# Altium PCB Arduino_VFO.PcbDoc
Units mm, origin at the board's own origin, x right, y up, seen from the top; angles counter-clockwise.
Board outline 100 x 100 mm, 2 copper layers (Top Layer, Bottom Layer); 84 components, 56 nets, 263 pads, 348 vias.
Unrouted connection lines stored in the file: 1.
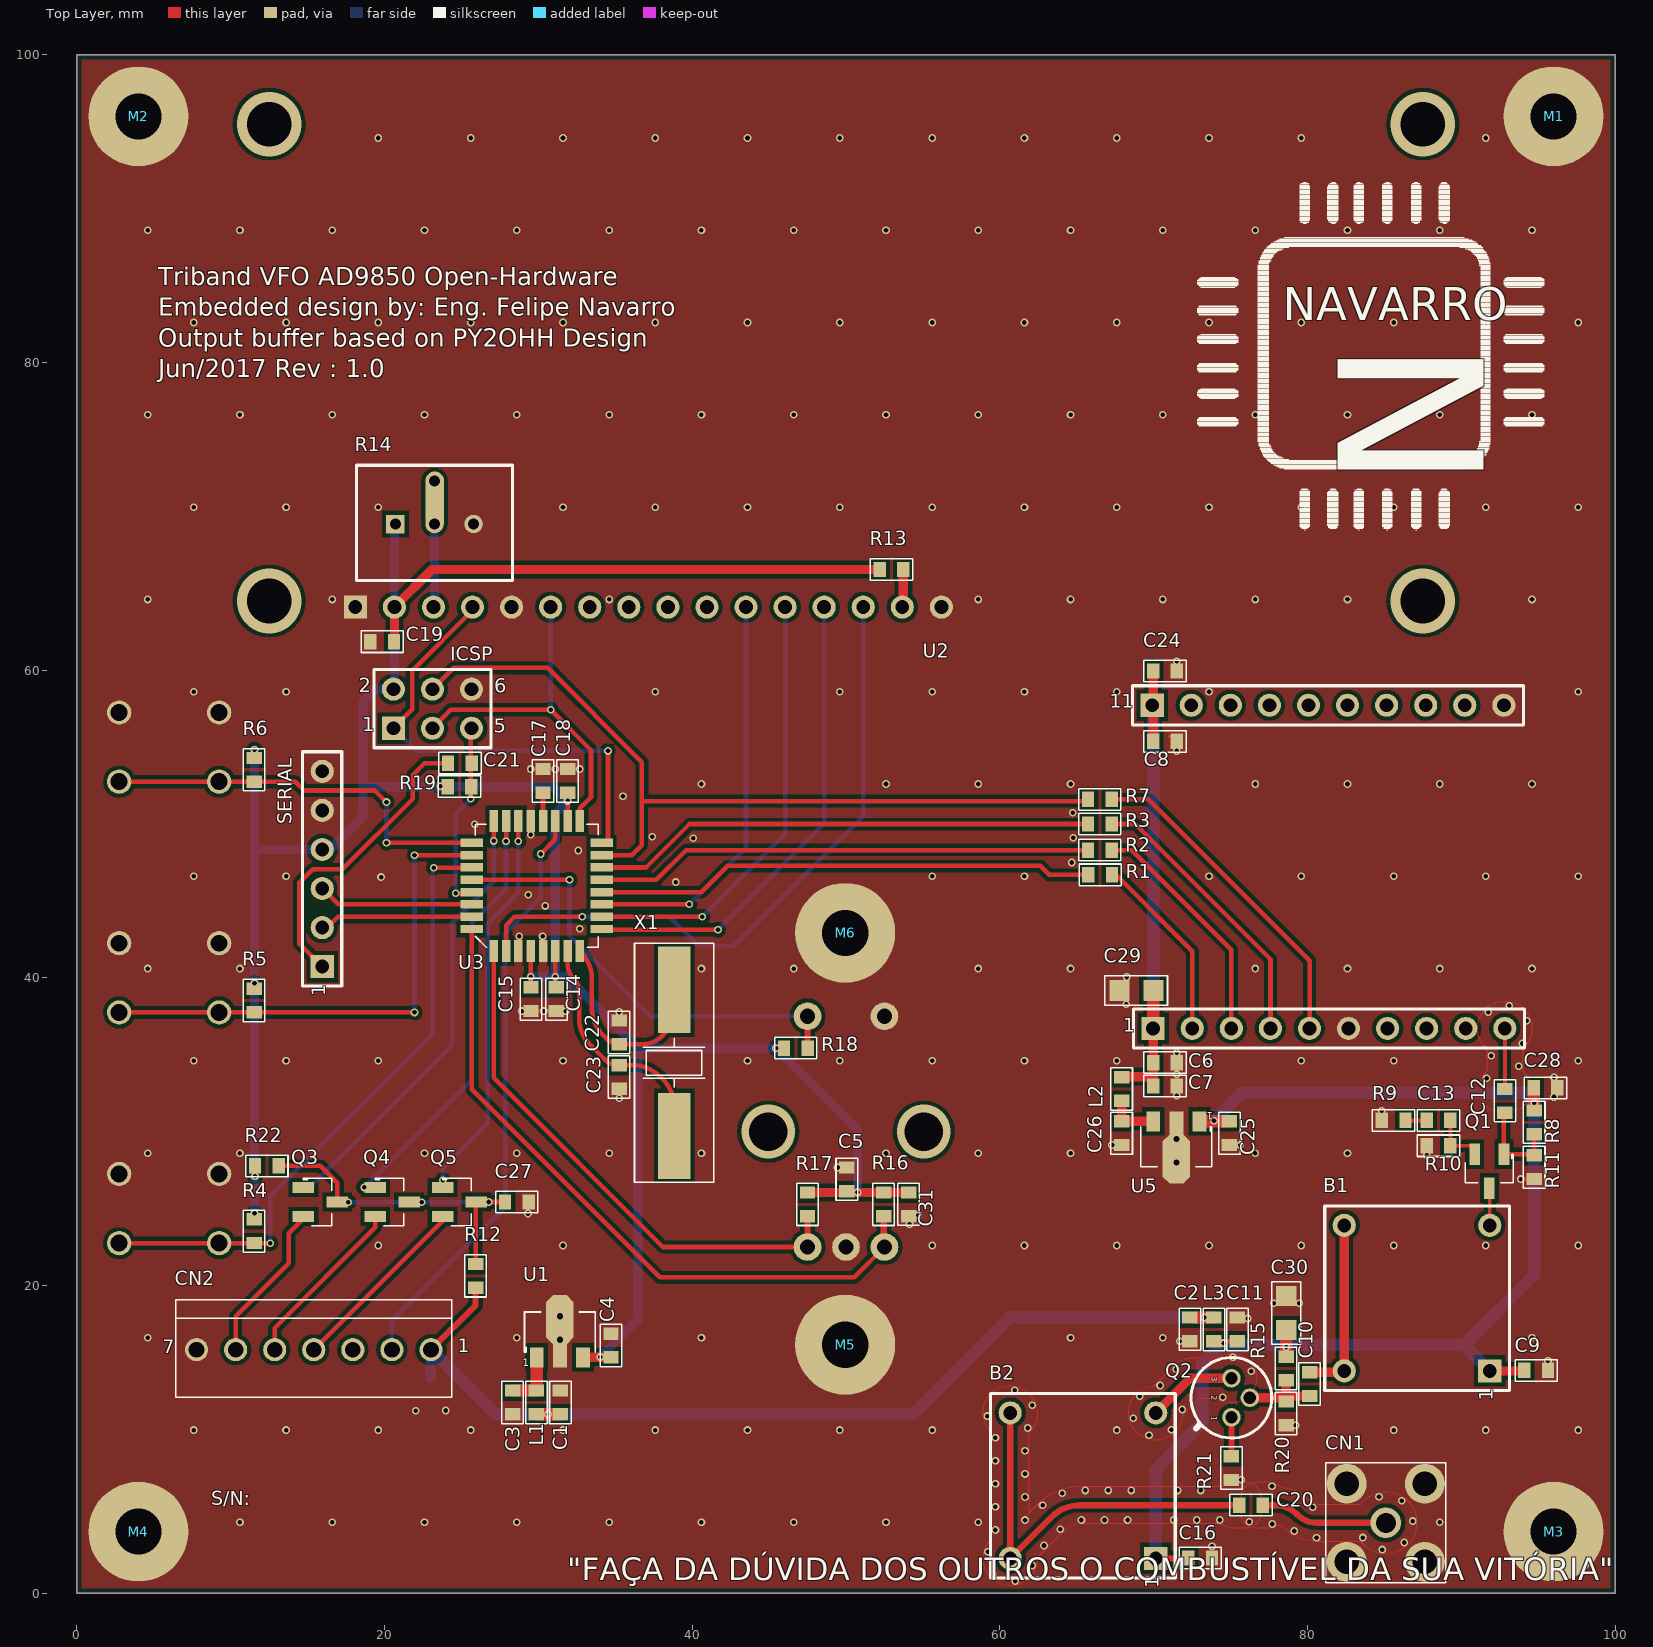
[diagram p0: Top Layer view]
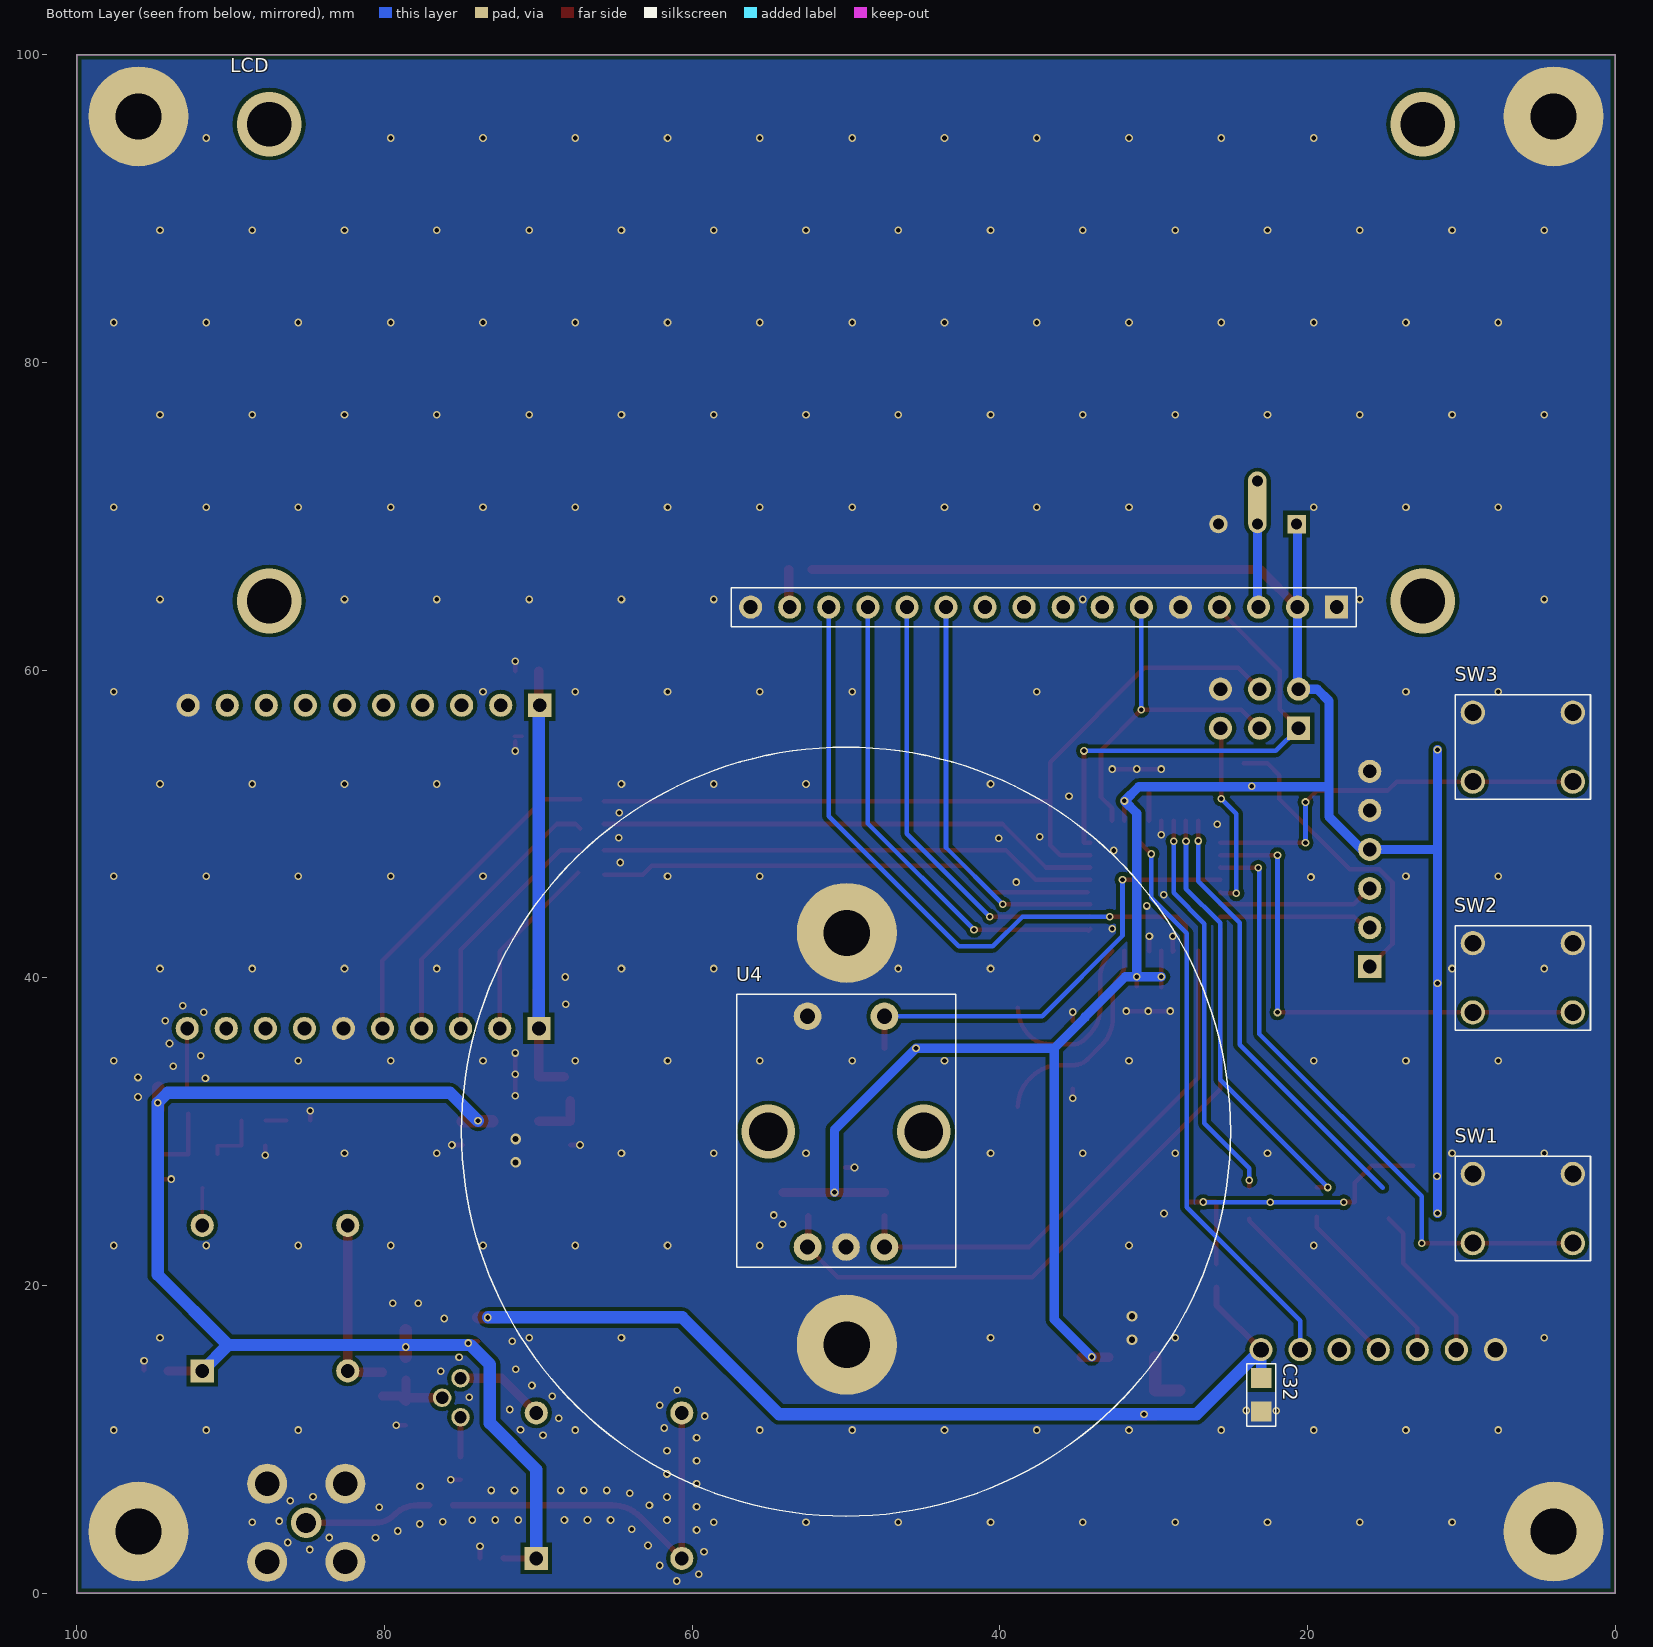
[diagram p1: Bottom Layer view, seen from below]

## Layer stack, top to bottom
Top Solder: solder mask 0.0102, Solder Resist, Dk 3.5
Top Layer: signal copper 0.0356
Dielectric 1: dielectric 0.32, FR-4, Dk 4.8
Bottom Layer: signal copper 0.0356
Bottom Solder: solder mask 0.0102, Solder Resist, Dk 3.5

## Board outline
0,0 100,0 100,100 0,100

## Design rules (kind name [scope] priority, off if disabled: settings)
Clearance [All] p1: gap=0.254
PolygonConnect [All] p1: connectstyle=Direct reliefconductorwidth=0.254 reliefentries=4 polygonreliefangle="90 Angle" airgapwidth=0.254
RoutingVias [All] p1: holewidth=0.711 width=1.27 viastyle="Through Hole" minholewidth=0.711 minwidth=1.27 maxholewidth=0.711 maxwidth=1.27
SolderMaskExpansion [All] p1: expansion=0.102
Width [All] p1: maxlimit=10 minlimit=0.254 preferedwidth=0.254
30 further rules are at their usual default settings.

## Components (designator, comment, footprint, x,y, rotation, side; value= is the part's Value field where it differs from the comment)
B1 "BIFILAR" "Toroid Bifilar" 87.122,19.177 r90 top
B2 "BIFILAR" "Toroid Bifilar" 65.405,6.985 r90 top
C1 "Capacitor Cerâmico" CC0603 31.425,12.4 r270 top
C2 "Capacitor Cerâmico" CC0603 72.35,17.15 r90 top
C3 "Capacitor Cerâmico" CC0603 28.325,12.4 r90 top
C4 "Capacitor Cerâmico" CC0603 34.725,16.1 r270 top
C5 "Capacitor Cerâmico" CC0603 50.05,26.9 r270 top
C6 "Capacitor Cerâmico" CC0603 70.739,34.49 r180 top
C7 "Capacitor Cerâmico" CC0603 70.739,32.966 r180 top
C8 "Capacitor Cerâmico" CC0603 70.739,55.372 r180 top
C9 "Capacitor Cerâmico" CC0603 94.869,14.478 r180 top
C10 "Capacitor Cerâmico" CC0603 80.137,13.589 r270 top
C11 "Capacitor Cerâmico" CC0603 75.438,17.145 r270 top
C12 "Capacitor Cerâmico" CC0603 92.837,32.004 r270 top
C13 "Capacitor Cerâmico" CC0603 88.519,30.734 r0 top
C14 "Capacitor Cerâmico" CC0603 31.174,38.608 r90 top
C15 "Capacitor Cerâmico" CC0603 29.523,38.608 r90 top
C16 "Capacitor Cerâmico" CC0603 73.025,2.286 r180 top
C17 "Capacitor Cerâmico" CC0603 30.3,52.8 r270 top
C18 "Capacitor Cerâmico" CC0603 31.9,52.8 r270 top
C19 "Capacitor Cerâmico" CC0603 19.85,61.85 r0 top
C20 "Capacitor Cerâmico" CC0603 76.327,5.715 r180 top
C21 "Capacitor Cerâmico" CC0603 24.9,53.95 r0 top
C22 "Capacitor Cerâmico" CC0603 35.25,33.55 r90 top
C23 "Capacitor Cerâmico" CC0603 35.25,36.45 r270 top
C24 "Capacitor Cerâmico" CC0603 70.739,59.944 r180 top
C25 "Capacitor Cerâmico" CC0603 74.925,29.9 r90 top
C26 "Capacitor Cerâmico" CC0603 67.925,29.9 r90 top
C27 "Capacitor Cerâmico" CC0603 28.6,25.425 r180 top
C28 "Capacitor Cerâmico" CC0603 95.475,32.85 r180 top
C29 "Capacitor Cerâmico" CC0805 68.875,39.175 r0 top
C30 "Capacitor Cerâmico" CC0805 78.625,18.2 r270 top
C31 "Capacitor Cerâmico" CC0603 54.075,25.275 r90 top
C32 "Capacitor Cerâmico" CC0805 23,12.9 r90 bottom
CN1 "Conn MCX" "CONN MCX MOLEX" 85.09,4.572 r0 top
CN2 "Conector KK" "CONN HDR7-POL P.100" 15.4,15.825 r0 top
ICSP "Header 3X2" "CONN HDR2X3" 20.575,56.225 r0 top
L1 "Bead" CC0603 29.875,12.4 r90 top
L2 "Bead" CC0603 67.925,32.775 r90 top
L3 "Bead" CC0603 73.914,17.145 r270 top
LCD "LCD1602" LCD-1602 50,80 r0 bottom locked
M1 "Furo de Fixação" Furo_M3 96,96 r0 top locked
M2 "Furo de Fixação" Furo_M3 4,96 r0 top locked
M3 "Furo de Fixação" Furo_M3 96,4 r0 top locked
M4 "Furo de Fixação" Furo_M3 4,4 r0 top locked
M5 "Furo de Fixação" Furo_M3 49.95,16.15 r0 top
M6 "Furo de Fixação" Furo_M3 49.95,42.925 r0 top
Q1 "MMBT3904" SOT-23-3N 91.821,27.432 r270 top
Q2 "2n3866" TO-92R 75.057,12.7 r270 top
Q3 "MMBT3904" SOT-23-3N 15.825,25.425 r0 top
Q4 "MMBT3904" SOT-23-3N 20.5,25.425 r0 top
Q5 "MMBT3904" SOT-23-3N 24.875,25.425 r0 top
R1 "Resistor" CC0603 66.525,46.7 r0 top
R2 "Resistor" CC0603 66.5,48.3 r0 top
R3 "Resistor" CC0603 66.5,50 r0 top
R4 "Resistor" CC0603 11.525,23.525 r90 top
R5 "Resistor" CC0603 11.525,38.525 r90 top
R6 "Resistor" CC0603 11.525,53.525 r90 top
R7 "Resistor" CC0603 66.5,51.6 r0 top
R8 "Resistor" CC0603 94.742,30.607 r90 top
R9 "Resistor" CC0603 85.598,30.734 r0 top
R10 "Resistor" CC0603 88.519,29.083 r0 top
R11 "Resistor" CC0603 94.742,27.686 r90 top
R12 "Resistor" CC0603 25.925,20.625 r270 top
R13 "Resistor" CC0603 52.959,66.548 r180 top
R14 "Potenciômetro" POT 23.25,69.5 r0 top
R15 "Resistor" CC0603 78.613,14.605 r90 top
R16 "Resistor" CC0603 52.451,25.273 r90 top
R17 "Resistor" CC0603 47.498,25.273 r90 top
R18 "Resistor" CC0603 46.736,35.433 r180 top
R19 "Resistor" CC0603 24.875,52.425 r180 top
R20 "Resistor" CC0603 78.613,11.684 r90 top
R21 "Resistor" CC0603 75.057,8.128 r90 top
R22 "Resistor" CC0603 12.35,27.775 r180 top
SERIAL "Header 6" "CONN HDR1X6" 15.95,40.725 r90 top
SW1 "Top Switch" SWITCH-TACTIL_6x6 6,25 r0 bottom
SW2 "Top Switch" SWITCH-TACTIL_6x6 6,40 r0 bottom
SW3 "Top Switch" SWITCH-TACTIL_6x6 6,55 r0 bottom
U1 "MC78L05A" SOT-89-3N 31.4,16.975 r90 top
U2 "AD9850" AD9850 69.969,36.711 r0 top
U3 "ATMEGA328P" TQFP-32N 29.904,45.974 r90 top
U4 "Encoder CTS290" "ENCODER - CTS 290" 50,30 r270 bottom locked
U5 "MC78L05A" SOT-89-3N 71.475,29.025 r270 top
X1 "16Mhz" HC/49US 38.825,34.475 r90 top

## Footprints (in the part's own frame and the unit in brackets; to place one, negate y for a bottom-side part, rotate by r counter-clockwise, add the part's x,y. Pads: shape width x height; smd on the part's side, far side on the other; paste and mask are expansions set on the pad)
AD9850 [mm] "Connector; Header; 10 Position"
  rect 1.5x1.5 hole 0.9: 1(0,0) 11(-0.062,21.007)
  round 1.5 hole 0.9: 2(2.54,0) 3(5.08,0) 4(7.62,0) 5(10.16,0) 6(12.7,0) 7(15.24,0) 8(17.78,0) 9(20.32,0) 10(22.86,0) 12(2.478,21.007) 13(5.018,21.007) 14(7.558,21.007) 15(10.098,21.007) 16(12.638,21.007) 17(15.178,21.007) 18(17.718,21.007) 19(20.258,21.007) 20(22.798,21.007)
  silkscreen extent -1.33,-1.27 24.13,22.28, body extent -14.97,-2.21 30.03,23.29, height 9.9
CC0603 [mm] "Chip Resistor, 2-Leads, Body 1,6x0,8mm, IPC Medium Density"
  rect 0.8x1 smd: 1(-0.77,0) 2(0.77,0)
  silkscreen extent -1.37,-0.7 1.38,0.7, body extent -0.8,-0.42 0.8,0.43, height 0.45
CC0805 [mm] "Chip Resistor, 2-Leads, Body 2,0x1,2mm, IPC Medium Density"
  rect 1.3x1.35 smd: 1(-1.1,0) 2(1.1,0)
  silkscreen extent -2.05,-0.95 2.02,0.95, body extent -1,-0.62 1,0.63, height 0.6
"CONN HDR1X6" [mm] "Connector; Header; 6 Position"
  rect 1.5x1.5 hole 0.9: 1(0,0)
  round 1.5 hole 0.9: 2(2.54,0) 3(5.08,0) 4(7.62,0) 5(10.16,0) 6(12.7,0)
  silkscreen extent -1.27,-1.27 13.97,1.27, body extent -1.27,-1.27 13.97,1.27, height 8.51
"CONN HDR2X3" [mm] "Connector; Header; 3x2 Position"
  rect 1.5x1.5 hole 0.9: 1(0,0)
  round 1.5 hole 0.9: 2(0,2.54) 3(2.54,0) 4(2.54,2.54) 5(5.08,0) 6(5.08,2.54)
  silkscreen extent -1.27,-1.27 6.35,3.81, body extent -1.27,-1.27 6.35,3.81, height 8.49
"CONN HDR7-POL P.100" [mm] "Conector KK Macho, Pitch 2.54mm, 7 Polos"
  round 1.5 hole 1.02: 1(7.62,0) 2(5.08,0) 3(2.54,0) 4(0,0) 5(-2.54,0) 6(-5.08,0) 7(-7.62,0)
  silkscreen extent -8.97,-3.11 8.97,3.25, body extent -8.57,-2.71 8.55,3.29, height 12
"CONN MCX MOLEX" [mm]
  round 2 hole 1.3: 1(0,0)
  round 2.6 hole 1.6: 2(2.54,-2.54) 3(2.54,2.54) 4(-2.54,2.54) 5(-2.54,-2.54)
  silkscreen extent -3.91,-3.89 3.89,3.89, body extent -3,-3 3,3, height 5.6
"ENCODER - CTS 290" [mm] "Trimmer Through Hole"
  round 1.8 hole 1: 1(7.5,2.5) 2(7.5,0) 3(7.5,-2.5) 4(-7.5,-2.5) 5(-7.5,2.5)
  silkscreen extent -8.92,-7.1 8.83,7.14, body extent -7.52,-6.61 7.43,6.49, height 24.8
Furo_M3 [mm] "Furo metalizado para parafuso M3"
  round 6.5 hole 3 paste+0: X(0,0)
  body extent -2.8,-2.8 2.8,2.8, height 2.38
HC/49US [mm] "Crystal, 2-Leads, Body 11,5x4,7mm, IPC Low Density"
  rect 5.6x2.1 smd: 1(-4.75,0) 2(4.75,0)
  silkscreen extent -7.77,-2.58 7.78,2.58, body extent -6.15,-2.25 6.15,2.25, height 5.18
LCD-1602 [mm]
  rect 1.5x1.5 hole 0.9: 1(-31.9,15.9)
  round 1.5 hole 0.9: 2(-29.36,15.9) 3(-26.82,15.9) 4(-24.28,15.9) 5(-21.74,15.9) 6(-19.2,15.9) 7(-16.66,15.9) 8(-14.12,15.9) 9(-11.58,15.9) 10(-9.04,15.9) 11(-6.5,15.9) 12(-3.96,15.9) 13(-1.42,15.9) 14(1.12,15.9) 15(3.66,15.9) 16(6.2,15.9)
  silkscreen extent -33.17,14.63 7.47,17.17, body extent -40,-18 40,18, height 20.7
POT [mm] "Thru-Hole; 3 Leads"
  rect 1.2x1.2 hole 0.7: 1(-2.54,0)
  oval 1.2x4 hole 0.7 copper offset 0,1.4: 2(0,0)
  round 1.2 hole 0.7: 3(2.54,0)
  silkscreen extent -5.08,-3.68 5.08,3.82, body extent -4.6,-2.41 4.6,2.39, height 12.01
SOT-23-3N [mm] "SOT23, 3-Leads, Body 3,1x2,7mm (max), Pitch 0,95mm, IPC Medium Density"
  rect 1.4x0.7 smd: 1(-1.1,0.95) 2(-1.1,-0.95) 3(1.1,0)
  silkscreen extent -1.1,-1.55 0.75,1.55, body extent -1.4,-1.45 1.4,1.45, height 1.25
SOT-89-3N [mm] "SOT89, 3-Leads, Body 4,5x2,4mm (max), Pitch 1,50mm, Lead Span 4,1mm, IPC High Density"
  rect 1.3x0.9 smd: 1(-1.65,1.5) 3(-1.65,-1.5)
  rect 1.5x0.9 smd: 2(-1.55,0)
  oct 3.2x1.8 smd: 2(0.8,0)
  silkscreen extent -1.3,-2.3 1.3,2.3, body extent -2.18,-2.25 1.75,2.25, height 1.4
SWITCH-TACTIL_6x6 [mm]
  round 1.575 hole 1.1 paste+0 mask+0.102: 1(-3.25,2.25) 2(3.25,2.25) 3(-3.25,-2.25) 4(3.25,-2.25)
  silkscreen extent -4.4,-3.4 4.4,3.4, body extent -3,-3 3,3, height 16.6
TO-92R [mm]
  round 1.2 hole 0.8: 1(1.27,0) 2(0,1.2) 3(-1.27,0)
  silkscreen extent -2.62,-2.62 2.62,2.62, body extent -2.8,-2.81 2.81,2.8, height 4.8
"Toroid Bifilar" [mm] "Connector; Header; 4 Position"
  rect 1.5x1.5 hole 0.9: 1(-4.73,-4.73)
  round 1.5 hole 0.9: 2(-4.73,4.73) 3(4.73,4.73) 4(4.73,-4.73)
  silkscreen extent -6,-6 6,6, body extent -3.99,-4.01 4.01,3.98, height 3.3
TQFP-32N [mm] "TQFP, 32-Leads, Body 7.00x7.00mm, Pitch 0.80mm, IPC Medium Density"
  rect 1.45x0.55 smd: 1(-4.225,2.8) 2(-4.225,2) 3(-4.225,1.2) 4(-4.225,0.4) 5(-4.225,-0.4) 6(-4.225,-1.2) 7(-4.225,-2) 8(-4.225,-2.8) 17(4.225,-2.8) 18(4.225,-2) 19(4.225,-1.2) 20(4.225,-0.4) 21(4.225,0.4) 22(4.225,1.2) 23(4.225,2) 24(4.225,2.8)
  rect 0.55x1.45 smd: 9(-2.8,-4.225) 10(-2,-4.225) 11(-1.2,-4.225) 12(-0.4,-4.225) 13(0.4,-4.225) 14(1.2,-4.225) 15(2,-4.225) 16(2.8,-4.225) 25(2.8,4.225) 26(2,4.225) 27(1.2,4.225) 28(0.4,4.225) 29(-0.4,4.225) 30(-1.2,4.225) 31(-2,4.225) 32(-2.8,4.225)
  silkscreen extent -4,-4 4,4, body extent -4.5,-4.5 4.5,4.5, height 1.5

## Part data
B1 B2: library part "Toroid Bifilar", "Toroid Bifilar"
C1 C5 C6 C18: library part "Cap 1uF 50V 0603 X5R", "Capacitor (Semiconductor SIM Model)"
C2 C3 C4 C7 C9 C10 C11 C12 C13 C14 C15 C16 C17 C19 C20 C21 C24 C25 C26 C27 C28 C31: library part "Cap 100nF 50V 0603 X7R", "Capacitor (Semiconductor SIM Model)"
C8: library part "Cap 1nF 50V 0603 NP0", "Capacitor (Semiconductor SIM Model)"
C22 C23: library part "Cap - $Val $V $Footprint $Classe_1", "Capacitor (Semiconductor SIM Model)"
C29 C30 C32: library part "Cap 10uF 25V 0805 X5R", "Capacitor (Semiconductor SIM Model)"
CN1: "Conector MCX"
CN2: library part "KK 7P Macho-V P2.54mm"
ICSP: "Header, 5-Pin, Dual row"
L1 L2 L3: library part "Bd 1K@100MHz 0603 400mA"
LCD: "LCD Generico 16 caracteres X 2 linhas"
M1 M2 M3 M4 M5 M6: library part Parafuso, "Furo para parafuso"
Q1 Q3 Q4 Q5: library part "TRS MMBT3904 40V 200mA SOT-23-3N", "NPN General Purpose Amplifier"
Q2: library part "TRS BC108 TO-18", "NPN General Purpose Amplifier"
R1 R2 R3 R7: library part "Res 470R 5% 0603 1/10W"
R4 R5 R6 R16 R17 R18: library part "Res 4K7 1% 0603 1/10W"
R8 R15: library part "Res 2K2 5% 0603 1/10W"
R9: library part "Res 4R7 1% 0603 1/10W"
R10: library part "Res 100R 5% 0603 1/10W"
R11 R20: library part "Res 1K 1% 0603 1/10W"
R12 R22: library part "Res 0R 0603 1/10W"
R13: library part "Res 220R 1% 0603 1/10W"
R14: library part "Res Pot", "Potenciometro"
R19: library part "Res 10K 1% 0603 1/10W"
R21: library part "Res 47K 1% 0603 1/10W"
SERIAL: "Header, 6-Pin"
SW1 SW2 SW3: library part "SW-SPST Tactil", "Single-Pole, Single-Throw Switch"
U1 U5: library part MC78L05, "Regulador Linear 5V"
U2: "DDS AD9850 Module"
U3: "IC MCU 32KB FLASH 20MHZ 32TQFP"
U4: library part "Encoder CTS 290", "Memória"
X1: library part XTAL, "Crystal Oscillator"

## Via types
v1: diameter 0.5, hole 0.3, Top Layer to Bottom Layer, tented both sides, 337 vias
v2: diameter 0.7, hole 0.4, Top Layer to Bottom Layer, tented both sides, 4 vias
v3: diameter 4.2, hole 2.9, Top Layer to Bottom Layer, 4 vias
v4: diameter 3.5, hole 2.5, Top Layer to Bottom Layer, 2 vias
v5: diameter 1.2, hole 0.7, Top Layer to Bottom Layer, 1 vias

## Nets (pads, with @x,y where several pads share a name; then routed paths per layer and width w, separated by ;. In a path a pad name is that pad's centre, name@x,y a point inside that pad or via, vN(x,y) a via of type N, cw(c..) or ccw(c..) an arc to the next point about the centre after c; other vN are vias at no path point)
5V: C4.2 C5.2 C14.2 C15.2 C18.2 C19.2 C31.2 ICSP.2 LCD.2 R4.2 R5.2 R6.2 R13.2 R14.1 R16.2 R17.2 R18.2 R19.2 R22.2 SERIAL.4 U1.3 U3.4 U3.6 U3.18 | length 183.5
  Top Layer w0.3: C15.2@29.504,39.397 U3.4 ; C14.2@31.104,39.448 v1(31.104,40.075) U3.6 ; U3.18@31.9,50.199 v1(31.9,51.5)
  Top Layer w0.6: C19.2@20.64,62.095 LCD.2 23.088,66.548 R13.2 ; U1.3@32.905,15.33 C4.2 ; R17.2 R16.2 52.453,26.045 C31.2
  Bottom Layer w0.6: v1(11.545,24.695) 11.545,48.345 ; v1(11.545,54.82) 11.545,48.345 ; ICSP.2 19.365,58.765 18.6,58 18.6,52.425 ; ICSP.2@20.64,58.675 LCD.2 R14.1@20.64,69.43 ; v1(29.5,40.075) v1(31.104,40.075) ; v1(34.025,15.35) 36.463,17.788 36.463,35.425 ; v1(50.75,26.05) 50.75,30.125 v1(45.45,35.425) 36.463,35.425 ; 11.545,48.345 SERIAL.4 16.47,48.345 18.6,50.475 18.6,52.425 ; 18.6,52.425 30.975,52.425 v1(31.9,51.5) 31.104,50.704 v1(31.104,40.075) ; v1(31.104,40.075) 31.85,40.075 34.446,37.479 34.446,37.442 36.463,35.425
  other v1: 11.58,27.105 11.55,39.65 23.625,52.45
5V_DDS: C6.2 C7.2 C8.2 C24.2 C29.2 L2.2 U2.1 U2.11 | length 35.1
  Top Layer w0.4: C8.2@69.915,55.426 U2.11@69.915,57.71
  Top Layer w0.6: L2.2@68.311,33.575 69.969,33.575 C6.2 U2.1 ; C8.2 C24.2
  Top Layer w0.8: U2.1@69.975,36.717 C29.2
  Bottom Layer w0.8: U2.1@69.977,36.703 U2.11@69.977,57.648
12V: C1.2 C2.2 C32.2 CN2.1 L1.1 L3.1 R12.2 | length 64.5
  Top Layer w0.4: CN2.1 25.925,18.73 R12.2
  Top Layer w0.8: L1.1 C1.2 ; C2.2@72.6,17.915 L3.1
  Bottom Layer w0.7: C32.2 23,15.805 CN2.1
  Bottom Layer w0.8: CN2.1 27.22,11.625 54.35,11.625 60.65,17.925 v1@73.275,17.925
  other v1: 30.625,11.625 73.285,17.915
12V_POWER: B1.1 B2.1 C9.2 C11.2 C16.2 C25.2 C28.2 C30.2 L3.2 R8.2 R15.2 U5.1 | length 84
  Top Layer w0.254: C9.2@94.068,14.447 C9.2
  Top Layer w0.3: L3.2@73.922,16.383 C11.2@75.43,16.383
  Top Layer w0.4: B2.1 72.18,2.255 ccw(c72.18,2.361) C16.2
  Top Layer w0.6: B1.1 C9.2@94.068,14.447
  Top Layer w0.8: U5.1 C25.2@74.92,30.675 ; R15.2 78.625,15.387 C30.2 ; R8.2@94.705,31.414 C28.2
  Bottom Layer w0.8: B2.1 70.135,8.032 73.152,11.049 73.152,14.859 v1@74.422,16.129 ; v1(73.925,30.7) 75.75,32.525 94.094,32.525 v1(94.742,31.877) ; v1@74.549,16.129 90.17,16.129 ; B1.1 90.17,16.129 ; v1@94.742,31.75 94.742,20.701 90.17,16.129
  other v1: 78.613,16.002 74.549,16.256
A: R17.1 U3.1 U4.1 | length 35.2
  Top Layer w0.3: U3.1 27.104,33.496 38.1,22.5 U4.1
  Top Layer w0.4: U4.1@47.498,22.502 R17.1
B: R16.1 U3.32 U4.3 | length 45.1
  Top Layer w0.3: U3.32 25.679,32.746 37.9,20.525 50.525,20.525 U4.3
  Top Layer w0.4: U4.3@52.451,22.549 R16.1
CNTR1: CN2.6 Q3.2 | length 10.3
  Top Layer w0.3: CN2.6 10.32,17.995 13.775,21.45 13.775,23.4 Q3.2@14.725,24.35
CNTR2: CN2.5 Q4.2 | length 11.4
  Top Layer w0.3: CN2.5 12.86,17.235 19.4,23.775 Q4.2
CNTR3: CN2.4 Q5.2 | length 12
  Top Layer w0.3: CN2.4 23.775,24.2 Q5.2@23.775,24.346
DATA: R3.1 U3.14 | length 32.8
  Top Layer w0.3: U3.14 36.999,47.174 39.825,50 R3.1
DB4: LCD.11 U3.11 | length 26.5
  Top Layer w0.3: U3.11 U3.11 v1(39.8,44.775)
  Bottom Layer w0.3: v1(39.8,44.775) 43.5,48.475 LCD.11
DB5: LCD.12 U3.10 | length 28.9
  Top Layer w0.3: U3.10 34.155,44 34.18,43.975 v1(40.65,43.975)
  Bottom Layer w0.3: v1(40.65,43.975) 46.04,49.365 LCD.12
DB6: LCD.13 U3.9 | length 31.5
  Top Layer w0.3: U3.9 34.253,43.05 34.328,43.125 v1(41.675,43.125)
  Bottom Layer w0.3: v1(41.675,43.125) 48.58,50.03 LCD.13
DB7: LCD.14 U3.2 | length 43
  Top Layer w0.3: U3.2 27.904,43.429 28.45,43.975 v1(32.85,43.975)
  Bottom Layer w0.3: v1(32.85,43.975) 38.525,43.975 40.45,42.05 42.675,42.05 51.12,50.495 LCD.14
FQUP: R2.1 U3.13 | length 32.4
  Top Layer w0.3: U3.13 37.674,46.374 39.6,48.3 R2.1
GND: C1.1 C2.1 C3.1 C4.1 C5.1 C6.1 C7.1 C8.1 C9.1 C11.1 C14.1 C15.1 C16.1 C17.1 C18.1 C19.1 C22.1 C23.1 C24.1 C25.1 C26.1 C27.1 C28.1 C29.1 C30.1 C31.1 C32.1 CN1.2 CN1.3 CN1.4 CN1.5 CN2.7 ICSP.6 LCD.1 LCD.5 LCD.16 M1.X M2.X M3.X M4.X M5.X M6.X R9.1 R10.1 R11.1 R14.3 R20.1 R21.1 SERIAL.5 SERIAL.6 SW1.3 SW1.4 SW2.3 SW2.4 SW3.3 SW3.4 U1.2 U2.6 U2.20 U3.3 U3.5 U3.21 U4.2 U4.4 U5.2 | length 21.5
  Top Layer w0.254: 71.05,55.705 C8.1@71.558,55.705
  Top Layer w0.3: U3.3 28.75,41.703 v1(28.75,42.7) ; v1(28.913,37.838) C15.1 v1(31.787,37.838) ; v1(29.5,53.57) C17.1 C18.1 v1(32.7,53.57) ; v1(29.504,49.304) U3.21 ; v1@30.275,42.775 30.275,41.778 U3.5 U3.5@30.285,41.73 ; v1(35.25,32.175) C22.1 ; C23.1 v1(35.25,37.775) ; v1(49.45,27.67) C5.1 ; v1(67.295,29.13) C26.1 ; v1@71.509,32.339 C7.1 v1(71.509,33.728) C6.1 v1(71.509,35.117) ; v1(71.509,54.745) C8.1 ; C24.1 v1(71.509,60.571) ; C16.1 v1(73.795,3.04) ; C25.1 v1(75.62,29.13) ; R21.1 75.057,7.366 v1(75.692,7.366) ; R20.1 79.24,10.914 v1(79.248,10.922) ; R9.1 v1(84.828,31.361) ; v1(87.749,28.456) R10.1 ; v1(93.861,26.916) R11.1 ; v1(95.631,15.113) 95.639,15.105 C9.1
  other v1: 61.007,0.784 59.574,1.226 62.112,1.798 59.231,2.686 84.865,2.83 62.871,3.093 86.293,3.288 80.585,3.608 83.585,3.612 79.147,4.036 59.715,4.106 63.931,4.153 77.719,4.495 10.6,4.6 16.6,4.6 22.6,4.6 28.6,4.6 34.6,4.6 40.6,4.6 46.6,4.6 52.6,4.6 58.6,4.6 88.6,4.6 76.225,4.632 86.847,4.682 61.635,4.748 65.306,4.755 66.806,4.755 68.306,4.755 71.306,4.755 72.806,4.755 74.306,4.755 80.344,5.585 59.715,5.606 62.78,5.717 86.121,5.995 61.635,6.248 84.647,6.274 64.064,6.492 65.553,6.675 67.053,6.675 68.553,6.675 71.553,6.675 73.053,6.675 77.693,6.946 59.715,7.106 61.635,7.748 59.715,8.606 61.635,9.248 59.715,10.106 69.701,10.272 7.6,10.6 13.6,10.6 19.6,10.6 25.6,10.6 31.6,10.6 37.6,10.6 43.6,10.6 49.6,10.6 55.6,10.6 67.6,10.6 85.6,10.6 91.6,10.6 97.6,10.6 71.162,10.611 61.823,10.736 68.67,11.362 59.183,11.509 22.025,11.85 23.975,11.875 71.861,11.938 62.1,12.21 74.494,12.724 69.091,12.802 60.97,13.196 70.418,13.501 76.345,14.414 71.479,14.561 75.155,15.327 71.7,16.375 4.6,16.6 28.6,16.6 40.6,16.6 64.6,16.6 70.6,16.6 94.6,16.6 76.125,17.85 77.8,18.85 79.475,18.85 19.6,22.6 31.6,22.6 55.6,22.6 61.6,22.6 67.6,22.6 73.6,22.6 79.6,22.6 85.6,22.6 91.6,22.6 97.6,22.6 54.125,23.975 54.7,24.575 29.325,24.675 4.6,28.6 10.6,28.6 22.6,28.6 28.6,28.6 34.6,28.6 40.6,28.6 52.6,28.6 58.6,28.6 64.6,28.6 76.6,28.6 82.6,28.6 96.025,32.25 71.501,32.331 91.644,33.462 96.025,33.525 93.731,34.252 7.6,34.6 13.6,34.6 19.6,34.6 31.6,34.6 43.6,34.6 49.6,34.6 55.6,34.6 61.6,34.6 67.6,34.6 73.6,34.6 79.6,34.6 85.6,34.6 97.6,34.6 91.943,34.932 93.977,35.732 94.254,37.206 91.757,37.77 30.35,37.838 93.124,38.192 68.225,38.275 68.25,40.05 4.6,40.6 10.6,40.6 40.6,40.6 46.6,40.6 58.6,40.6 64.6,40.6 76.6,40.6 82.6,40.6 88.6,40.6 94.6,40.6 30.275,42.7 32.7,43.2 30.45,44.675 29.35,45.4 38.925,46.225 19.775,46.55 7.6,46.6 13.6,46.6 55.6,46.6 61.6,46.6 73.6,46.6 79.6,46.6 85.6,46.6 91.6,46.6 97.6,46.6 64.675,47.5 32.6,48.275 40.075,49.075 64.775,49.1 37.4,49.175 25.875,49.975 64.75,50.725 35.5,51.8 40.6,52.6 52.6,52.6 58.6,52.6 64.6,52.6 76.6,52.6 82.6,52.6 88.6,52.6 94.6,52.6 31.1,53.575 7.6,58.6 13.6,58.6 37.6,58.6 49.6,58.6 55.6,58.6 61.6,58.6 67.6,58.6 73.6,58.6 97.6,58.6 4.6,64.6 16.6,64.6 34.6,64.6 58.6,64.6 64.6,64.6 70.6,64.6 76.6,64.6 82.6,64.6 94.6,64.6 7.6,70.6 13.6,70.6 19.6,70.6 31.6,70.6 37.6,70.6 43.6,70.6 49.6,70.6 55.6,70.6 61.6,70.6 67.6,70.6 73.6,70.6 79.6,70.6 85.6,70.6 91.6,70.6 97.6,70.6 4.6,76.6 10.6,76.6 16.6,76.6 22.6,76.6 28.6,76.6 34.6,76.6 40.6,76.6 46.6,76.6 52.6,76.6 58.6,76.6 64.6,76.6 70.6,76.6 76.6,76.6 82.6,76.6 88.6,76.6 94.6,76.6 7.6,82.6 13.6,82.6 19.6,82.6 25.6,82.6 31.6,82.6 37.6,82.6 43.6,82.6 49.6,82.6 55.6,82.6 61.6,82.6 67.6,82.6 73.6,82.6 79.6,82.6 85.6,82.6 91.6,82.6 97.6,82.6 4.6,88.6 10.6,88.6 16.6,88.6 22.6,88.6 28.6,88.6 34.6,88.6 40.6,88.6 46.6,88.6 52.6,88.6 58.6,88.6 64.6,88.6 70.6,88.6 76.6,88.6 82.6,88.6 88.6,88.6 94.6,88.6 19.6,94.6 25.6,94.6 31.6,94.6 37.6,94.6 43.6,94.6 49.6,94.6 55.6,94.6 61.6,94.6 67.6,94.6 73.6,94.6 79.6,94.6 91.6,94.6
  other v2: 31.4,16.475 31.4,17.995 71.475,28.005 71.475,29.525
MISO: ICSP.1 LCD.4 U3.16 | length 30.7
  Top Layer w0.3: ICSP.1 21.8,57.45 21.8,59.975 LCD.4@25.72,63.895 ; U3.16 34.524,48.774 34.525,48.775 v1(34.525,54.75)
  Bottom Layer w0.3: ICSP.1 22.05,54.75 v1(34.525,54.75)
MOSI: ICSP.4 R7.1 U3.15 | length 54
  Top Layer w0.3: ICSP.4 24.5,60.15 30.6,60.15 36.725,54.025 36.725,51.475 ; U3.15 36.074,47.974 36.725,48.625 36.725,51.475 ; R7.1@65.73,51.475 36.725,51.475
NetB1_2: B1.2 B1.3 C10.1 | length 11.6
  Top Layer w0.6: C10.1 B1.2@82.304,14.359 ; B1.2 B1.3
NetB1_4: B1.4 Q1.3 | length 2.4
  Top Layer w0.254: Q1.3 91.852,26.301 B1.4
NetB2_2: B2.2 B2.3 C20.2 | length 25.7
  Top Layer w0.4: B2.3 B2.2 63.391,4.971 cw(c65.187,3.175) 65.187,5.715 C20.2
NetB2_4: B2.4 Q2.3 | length 5.9
  Top Layer w0.6: B2.4 72.39,13.97 Q2.3
NetC3_2: C3.2 L1.2 U1.1 | length 3.7
  Top Layer w0.8: C3.2 L1.2 29.9,13.195 U1.1
NetC12_1: C12.1 U2.10 | length 3.9
  Top Layer w0.254: C12.1 U2.10@92.837,36.703
NetC12_2: C12.2 Q1.1 R8.1 R11.2 | length 5.9
  Top Layer w0.3: C12.2@92.771,31.168 Q1.1 R11.2@94.666,28.532 ; R11.2 R8.1
NetC13_1: C13.1 R9.2 | length 1.4
  Top Layer w0.254: R9.2 C13.1
NetC13_2: C13.2 Q1.2 R10.2 | length 3.8
  Top Layer w0.254: C13.2 R10.2 90.871,29.083 Q1.2
NetC17_2: C17.2 U3.20 | length 1.8
  Top Layer w0.3: U3.20@30.3,50.199 C17.2
NetC20_1: C20.1 CN1.1 | length 8.3
  Top Layer w0.4: C20.1 77.842,5.715 cw(c77.842,3.547) 79.375,5.08 ccw(c80.601,6.306) 80.601,4.572 CN1.1
NetC21_1: C21.1 SERIAL.1 | length 19.9
  Top Layer w0.3: SERIAL.1 14.475,42.2 14.475,46.2 15.325,47.05 17.25,47.05 21.825,51.625 21.825,53.175 22.6,53.95 C21.1
NetC26_2: C26.2 L2.1 U5.3 | length 3.4
  Top Layer w0.6: C26.2 L2.1 ; C26.2@67.93,30.675 U5.3
NetC27_2: C27.2 Q3.3 Q4.3 Q5.3 R12.1 R22.1 | length 21.2
  Top Layer w0.3: R22.1 15.825,27.775 16.925,26.675 Q3.3 v1@17.65,25.425 ; R12.1 25.925,25.4 Q5.3@25.975,25.45 ; Q5.3 v1(26.775,25.425) C27.2@27.78,25.425
  Bottom Layer w0.3: v1(17.65,25.4) v1(22.425,25.4) v1@26.775,25.4
NetLCD_3: LCD.3 R14.2 | length 5.3
  Bottom Layer w0.6: LCD.3@23.25,64.17 R14.2
  other v5: 23.25,72.3
NetLCD_15: LCD.15 R13.1 | length 2.4
  Top Layer w0.6: LCD.15@53.729,64.169 R13.1
NetQ2_1: Q2.1 R21.2 | length 2.5
  Top Layer w0.4: R21.2 Q2.1
NetQ3_1: Q3.1 U3.24 | length 28.7
  Top Layer w0.3: v1@27.104,48.979 U3.24
  Bottom Layer w0.3: 15.113,26.362 24.4,35.65 24.4,43.575 27.1,46.275 v1(27.1,48.9)
NetQ4_1: Q4.1 U3.23 | length 28.3
  Top Layer w0.3: v1(18.675,26.375) Q4.1 ; v1@27.904,48.904 U3.23
  Bottom Layer w0.3: v1(18.675,26.375) 25.675,33.375 25.675,43.575 27.9,45.8 v1(27.9,48.875)
NetQ5_1: Q5.1 U3.22 | length 25.7
  Top Layer w0.3: Q5.1@23.775,26.4 v1(23.775,26.85) ; v1@28.704,48.904 U3.22
  Bottom Layer w0.3: v1@23.775,26.95 23.775,27.625 26.7,30.55 26.7,43.525 28.7,45.525 v1(28.7,48.875)
NetR1_2: R1.2 U2.2 | length 12.2
  Top Layer w0.3: R1.2@67.422,46.827 72.517,41.733 U2.2@72.517,36.703
NetR2_2: R2.2 U2.3 | length 15.6
  Top Layer w0.3: R2.2@67.3,48.3 68.575,48.3 75.057,41.818 U2.3@75.057,36.703
NetR3_2: R3.2 U2.4 | length 18.6
  Top Layer w0.3: R3.2@67.27,49.705 67.565,50 68.8,50 77.597,41.203 U2.4@77.597,36.703
NetR7_2: R7.2 U2.5 | length 21.6
  Top Layer w0.3: R7.2 69.65,51.6 80.137,41.113 U2.5@80.137,36.703
OUTA: C10.2 Q2.2 R15.1 R20.2 | length 5.2
  Top Layer w0.6: Q2.2 R20.2@78.367,12.7 ; R15.1 R20.2 78.978,12.819 C10.2
RST: C21.2 ICSP.5 R19.1 U3.29 | length 12.2
  Top Layer w0.3: v1(24.625,45.5) 25.605,45.5 U3.29 ; v1(25.6,51.65) 25.6,56.17 ICSP.5
  Bottom Layer w0.3: v1(24.625,45.5) 24.625,50.675 v1(25.6,51.65)
RX: SERIAL.3 U3.30 | length 10.2
  Top Layer w0.3: SERIAL.3 16.981,44.774 U3.30
SCK: ICSP.3 LCD.6 U3.17 | length 23.5
  Top Layer w0.3: ICSP.3 24.315,57.425 v1(30.8,57.425) 33.425,54.8 33.425,51.75 32.704,51.029 U3.17
  Bottom Layer w0.3: v1(30.8,57.425) LCD.6
SW1: R18.1 U3.28 U4.5 | length 29.7
  Top Layer w0.3: U3.28 v1(32.024,46.374)
  Top Layer w0.4: R18.1 U4.5@47.506,37.494
  Bottom Layer w0.3: v1@32.025,46.35 32.025,42.725 37.25,37.5 U4.5
SW2: R4.1 SW1.1 SW1.2 U3.27 | length 41.2
  Top Layer w0.3: SW1.1 v1(12.575,22.75) ; v1(23.2,47.15) 25.655,47.15 U3.27
  Bottom Layer w0.3: v1(12.575,22.75) 12.575,25.8 23.125,36.35 23.125,47.174 23.149,47.15 v1(23.2,47.15)
SW3: R5.1 SW2.1 SW2.2 U3.26 | length 33.2
  Top Layer w0.3: SW2.1 SW2.2 v1(21.95,37.75) ; v1(21.95,47.974) U3.26
  Bottom Layer w0.3: v1(21.95,37.75) v1(21.95,47.974)
SW4: R6.1 SW3.1 SW3.2 U3.25 | length 26.1
  Top Layer w0.3: SW3.1 SW3.2 14.2,52.75 14.775,52.175 19.375,52.175 v1(20.125,51.425) ; v1(20.125,48.774) U3.25
  Bottom Layer w0.3: v1(20.125,48.774) v1(20.125,51.425)
TX: SERIAL.2 U3.31 | length 10
  Top Layer w0.3: SERIAL.2 16.265,43.265 16.974,43.974 U3.31
VRX: CN2.3
VTX: CN2.2 U3.19 | length 38.8
  Top Layer w0.3: v1(30.15,48.05) 31.104,49.004 U3.19
  Bottom Layer w0.3: CN2.2 20.48,17.705 27.85,25.075 27.85,42.9 30.15,45.2 v1(30.15,48.05)
WCLK: R1.1 U3.12 | length 32.4
  Top Layer w0.3: U3.12@34.3,45.574 38.651,45.574 38.654,45.571 40.596,45.571 42.3,47.275 62.625,47.275 63.2,46.7 R1.1@65.705,46.7
X1: C22.2 U3.7 X1.1 | length 14
  Top Layer w0.3: U3.7 31.904,40.916 ccw(c33.341,40.916) 32.325,39.9 cw(c31.54,39.115) 32.65,39.115 32.65,37.402 ccw(c35.19,37.402) 33.394,35.606 34.277,34.723 ccw(c35.25,35.696) C22.2 36.128,34.32 cw(c36.128,31.78) 37.924,33.576 38.081,33.419 cw(c36.285,31.623) X1.1@38.825,31.623
X2: C23.2 U3.8 X1.2 | length 12.1
  Top Layer w0.3: U3.8 32.731,41.722 cw(c30.935,39.926) 33.475,39.926 33.475,38.052 ccw(c36.015,38.052) 34.219,36.256 34.473,36.002 ccw(c35.25,36.778) C23.2 36.77,35.68 ccw(c36.77,37.455) 38.025,36.2 38.081,36.256 ccw(c36.285,38.052) X1.2@38.825,38.052
pads on no net: LCD.7 LCD.8 LCD.9 LCD.10 U2.7 U2.8 U2.9 U2.12 U2.13 U2.14 U2.15 U2.16 U2.17 U2.18 U2.19
copper on no net:
  other v3: 12.5,64.5 87.5,64.5 12.5,95.5 87.5,95.5
  other v4: 44.95,30 55.05,30

## Polygon pours and split planes (outlines as drawn)
GND on Bottom Layer "Top Layer-No Net" (solid, remove dead copper, pour order 0): 0,0 0,100 100,100 100,0
GND on Top Layer "Top Layer-GND 3" (solid, pour order 12): 93.157,38.447 93.413,38.378 93.595,38.303 93.824,38.17 93.981,38.05 94.168,37.863 94.288,37.706 94.421,37.477 94.496,37.295 94.546,37.108 94.565,37.039 94.591,36.843 94.591,36.579 94.565,36.383 94.496,36.127 94.421,35.945 94.288,35.716 94.168,35.559 93.988,35.379 93.988,33.941 94.054,33.891 94.215,33.681 94.316,33.436 94.351,33.174 94.351,32.374 94.316,32.112 94.215,31.867 94.054,31.657 93.844,31.496 93.599,31.395 93.337,31.36 92.337,31.36 92.075,31.395 91.83,31.496 91.62,31.657 91.459,31.867 91.358,32.112 91.323,32.374 91.323,33.174 91.358,33.436 91.459,33.681 91.62,33.891 91.686,33.941 91.686,35.365 91.677,35.372 91.49,35.559 91.37,35.716 91.237,35.945 91.162,36.127 91.112,36.314 91.093,36.383 91.067,36.579 91.067,36.843 91.093,37.039 91.162,37.295 91.237,37.477 91.37,37.706 91.49,37.863 91.677,38.05 91.834,38.17 92.063,38.303 92.245,38.378 92.432,38.428 92.501,38.447 92.697,38.473 92.961,38.473
GND on Top Layer "Top Layer-GND 2" (solid, pour order 10): 182 vertices, not listed, extent 68.373,9.953 76.68,15.593
GND on Top Layer "Top Layer-GND 1" (solid, pour order 6): 209 vertices, not listed, extent 58.913,0.493 76.971,13.477
GND on Top Layer "Top Layer-GND" (solid, pour order 4): 167 vertices, not listed, extent 75.683,2.558 87.104,7.229
GND on Top Layer "Top Layer-No Net" (solid, remove dead copper, pour order 2): 0,0 0,100 100,100 100,0

## Keep-outs
Keep-Out Layer:
  the board outline again, w0.1

## Other copper
Top Layer:
  region: 20,52.5
  region: 20,52.5
  region: 20,52.5
  region: 20,52.5
  region: 20,52.5
  region: 20,52.5
  region: 20,52.5
  region: 20,52.5
  region: 20,52.5
  region: 20,52.5
  region: 20,52.5
  region: 20,52.5
  region: 20,52.5
  region: 20,52.5
  region: 20,52.5
  region: 20,52.5
  region: 20,52.5
  region: 20,52.5
  region: 20,52.5
  region: 20,52.5
  region: 20,52.5
  region: 20,52.5
  region: 20,52.5
  region: 20,52.5
  region: 20,52.5
  region: 20,52.5

## Silkscreen, mask and mechanical layers (free items; w line width, h text height)
Top Overlay:
  drawing of 970 lines, arcs and shapes, not listed
  text "NAVARRO" at 78.394,82.038 h3.64
  text "N" at 78.2,81.475 h19.68 r270
  text "Triband VFO AD9850 Open-Hardware / Embedded design by: Eng. Felipe Navarro / Output buffer based on PY2OHH Design / Jun/2017 Rev : 1.0" at 5.3,78.65 h2
  text "S/N:" at 8.725,5.425 h1.52
  text "\"FAÇA DA DÚVIDA DOS OUTROS O COMBUSTÍVEL DA SUA VITÓRIA\"" at 31.875,0.35 h2.5
Bottom Overlay:
  circle w0.1: c50,30 r25
Mechanical 29:
  the board outline again, w0.1

## Text inside footprints (layer, text, board x,y; h text height)
B1: Top Overlay "1" at 92.348,12.512 h1.5 r90
B2: Top Overlay "1" at 70.631,0.32 h1.5 r90
CN2: Top Overlay "1" at 24.75,15.36 h1.5; Top Overlay "7" at 5.572,15.286 h1.5
ICSP: Top Overlay "2" at 18.318,58.241 h1.6; Top Overlay "1" at 18.543,55.717 h1.6; Top Overlay "5" at 27.091,55.618 h1.6; Top Overlay "6" at 27.146,58.222 h1.6
Q1: Mechanical 15 "3" at 92.035,26.664 h1 r180; Mechanical 15 "2" at 91.078,28.889 h1 r180; Mechanical 15 "1" at 92.918,28.939 h1 r180
Q2: Top Overlay "3" at 73.653,14.076 h0.6 r270; Top Overlay "2" at 73.653,12.832 h0.6 r270; Top Overlay "1" at 73.66,11.508 h0.6 r270
Q3: Mechanical 15 "3" at 16.593,25.639 h1 r270; Mechanical 15 "2" at 14.368,24.682 h1 r270; Mechanical 15 "1" at 14.318,26.522 h1 r270
Q4: Mechanical 15 "3" at 21.268,25.639 h1 r270; Mechanical 15 "2" at 19.043,24.682 h1 r270; Mechanical 15 "1" at 18.993,26.522 h1 r270
Q5: Mechanical 15 "3" at 25.643,25.639 h1 r270; Mechanical 15 "2" at 23.418,24.682 h1 r270; Mechanical 15 "1" at 23.368,26.522 h1 r270
SERIAL: Top Overlay "1" at 16.446,38.79 h1.5 r90
U1: Top Overlay "1" at 29,14.575 h0.8
U2: Top Overlay "11" at 67.131,57.272 h1.5; Top Overlay "1" at 68.034,36.215 h1.5
U5: Top Overlay "1" at 73.875,31.425 h0.8 r180